# Altium PCB PCB1.PcbDoc (part 3 of 3)
Units mil, origin at the board's own origin, x right, y up, seen from the top; angles counter-clockwise.
Board outline 8430 x 1950 mil, 4 copper layers (Top Layer, VCC, GND, Bottom Layer); 357 components, 242 nets, 1572 pads, 599 vias.
Unrouted connection lines stored in the file: 1.
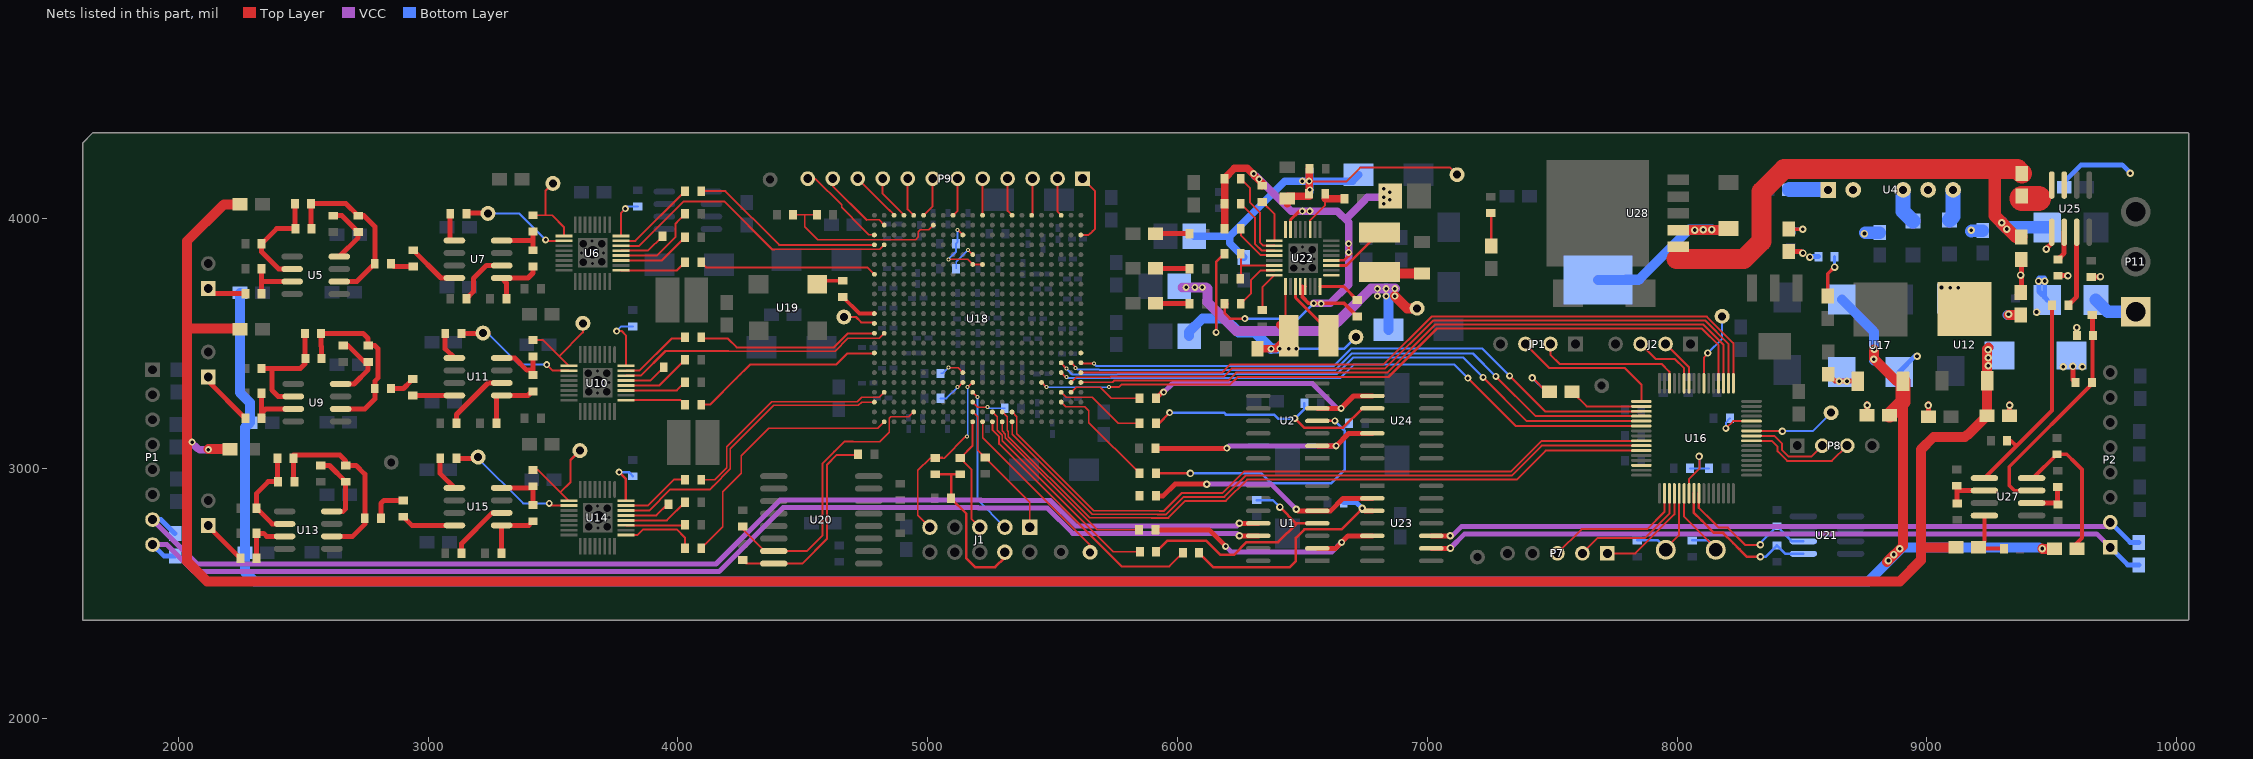
[diagram p5: the nets of this part, all layers, seen from the top]

## Via types
v1: diameter 16, hole 8, Top Layer to Bottom Layer, 223 vias
v2: diameter 30, hole 15, Top Layer to Bottom Layer, 157 vias
v3: diameter 28, hole 14, Top Layer to Bottom Layer, 154 vias
v4: diameter 24, hole 12, Top Layer to Bottom Layer, 60 vias
v5: diameter 196.85, hole 118.11, Top Layer to Bottom Layer, 4 vias
v6: diameter 50, hole 28, Top Layer to Bottom Layer, 1 vias

## Nets (pads, with @x,y where several pads share a name; then routed paths per layer and width w, separated by ;. In a path a pad name is that pad's centre, name@x,y a point inside that pad or via, vN(x,y) a via of type N, cw(c..) or ccw(c..) an arc to the next point about the centre after c; other vN are vias at no path point) (continued)
FPGA_LED8: U18.AB8 | length 3.1
  Top Layer w8: U18.AB8@5613.39,3462.2 U18.AB8@5615.59,3460
FPGA_NCE: R80.1 U18.L3 | length 140.2
  Top Layer w6: U18.L3@5180.31,3265.35 5200.67,3245 v1(5240,3245)
  Bottom Layer w6: v1(5240,3245) 5245,3240 R80.1@5310,3240
FPGA_NCONFIG: R83.1 U18.K5 | length 116
  Top Layer w8: v1(5120,3325) 5121.85,3325 U18.K5@5140.94,3344.09
  Bottom Layer w8: R83.1@5051.5,3280 5075,3280 v1(5120,3325)
FPGA_NCSO: C43.2 U18.E2 U20.7 | length 1185.2
  Top Layer w6: 4678,3107 4701,3107 4809,3107 4846,3144 4846,3200 4852,3206 4924.11,3206 U18.E2@4944.09,3225.98
  Top Layer w8: C43.2@4260,2767.54 4260,2757 4348,2669 U20.7@4384.04,2669 4516,2669 4578,2731 4578,3018.62 4625.38,3066 ; 4625.38,3068 4627.38,3068 4666.38,3107 4701,3107
FPGA_NSTATUS: R84.1 U18.K6 | length 107.7
  Top Layer w6: v1(5083,3403) 5121.41,3403 U18.K6@5140.94,3383.46
  Top Layer w8: U18.K6@5140.94,3383.46 U18.K6@5140.94,3384.06
  Bottom Layer w6: R84.1@5051.5,3380 5060,3380 v1(5083,3403)
FPGA_TCK: J1.1 R78.2 U18.L2 | length 555.7
  Top Layer w6: U18.L2@5180.31,3225.98 5200,3206.3 5200,3073.46 R78.2@5230,3043.46 5409,2864.46 J1.1@5409,2765
FPGA_TDI: J1.9 R77.1 U18.L5 | length 801.8
  Top Layer w6: 4975,2799 J1.9@5009,2765 4961,2813 4961,2992 5010.5,3041.5 R77.1@5030,3041.5 ; 5060,3045 5033.5,3045 R77.1@5030,3041.5 ; v1(5158,3128) 5153,3128 5066.5,3041.5 R77.1@5030,3041.5 ; v1@5161.22,3325 U18.L5@5180.31,3344.09
  Bottom Layer w6: v1@5160,3130 v1(5160,3325)
FPGA_TDO: J1.3 U18.L4 | length 593
  Top Layer w8: U18.L4@5180.31,3304.72 v1(5200,3285)
  Bottom Layer w8: v1(5200,3285) 5200,3003 5200,2874 J1.3@5309,2765
FPGA_TEST1: P9.1 U18.AB20 | length 302
  Top Layer w8: U18.AB20@5613.39,3934.65 5644.65,3934.65 5660,3950 ; P9.1@5620,4160 5670,4110 5670,3960 5660,3950 ; 5650,3940 5660,3950
FPGA_TEST2: P9.2 U18.Y22 | length 152.7
  Top Layer w8: P9.2@5520,4160 5520,4045 5520,4028.03 U18.Y22@5534.65,4013.39
FPGA_TEST3: P9.3 U18.U22 | length 193
  Top Layer w8: U18.U22@5416.54,4013.39 5420,4016.85 5420,4085 ; 5420,4040 5420,4085 ; P9.3@5420,4160 5420,4085
FPGA_TEST4: P9.4 U18.R22 | length 154
  Top Layer w8: P9.4@5320,4160 5320,4055 5320,4031.18 U18.R22@5337.8,4013.39
FPGA_TEST5: P9.5 U18.M22 | length 191.7
  Top Layer w8: U18.M22@5219.69,4013.39 5220,4013.7 5220,4085 ; 5220,4040 5220,4085 ; P9.5@5220,4160 5220,4085
FPGA_TEST6: P9.6 U18.J22 | length 154.2
  Top Layer w8: U18.J22@5101.57,4013.39 5120,4031.81 5120,4065 P9.6@5120,4160
FPGA_TEST7: P9.7 U18.F22 | length 161.7
  Top Layer w8: U18.F22@4983.46,4013.39 5020,4049.92 P9.7@5020,4160
FPGA_TEST8: P9.8 U18.E22 | length 156.6
  Top Layer w8: P9.8@4920,4160 4920,4060 4920,4037.48 U18.E22@4944.09,4013.39
FPGA_TEST9: P9.9 U18.D22 | length 234.7
  Top Layer w8: P9.9@4820,4160 4820,4100 4852.5,4067.5 ; 4890,4030 4852.5,4067.5 ; U18.D22@4904.72,4013.39 4904.72,4015.28 4852.5,4067.5
FPGA_TEST10: P9.10 U18.C22 | length 249.2
  Top Layer w8: P9.10@4720,4160 4820,4060 ; 4850,4030 4820,4060 ; U18.C22@4865.35,4013.39 4865.35,4014.65 4820,4060
FPGA_TEST11: P9.11 U18.B21 | length 300.6
  Top Layer w6: 4755,3995 4755.46,3994.54 4790,3994.54 4805.46,3994.54 U18.B21@4825.98,3974.02
  Top Layer w8: P9.11@4620,4160 4620,4130 4755,3995
FPGA_TEST12: P9.12 U18.A20 | length 368.6
  Top Layer w6: P9.12@4520,4160 4550,4160 4655,4055 4655,4045 4740,3960 4765,3935 ; 4767.77,3935 4765,3935 ; U18.A20@4786.61,3934.65 4765.35,3934.65 4765,3935
FPGA_TMS: J1.5 R76.1 U18.L1 | length 475.2
  Top Layer w8: U18.L1@5180.31,3186.61 5180.31,3091.81 R76.1@5130,3041.5 5175,2996.5 5175,2799 J1.5@5209,2765
GPS_TIMER: R103.2 U18.P1 | length 757.8
  Top Layer w6: U18.P1@5298.43,3186.61 5298.43,3149.93 5311,3137.36 5311,3122 5679,2754 R103.2@5846.54,2754
GPSX_N: P1.7 R1.2 U1.11 | length 4768.6
  Top Layer w20: v2@6246,2780 U1.11@6323.78,2780
  VCC w20: P1.7@1897,2795 2075,2617 4152.57,2617 4408.57,2873 5214.43,2873 5215.64,2871.79 5491.21,2871.79 5593,2770 6238,2770 v2(6248,2780)
  Bottom Layer w20: P1.7@1897,2795 1930.94,2795 R1.2@1987.02,2738.92
GPSX_P: P1.8 R1.1 U1.12 | length 4735.5
  Top Layer w20: v2@6246,2730 U1.12@6323.78,2730
  VCC w20: P1.8@1897,2695 1954.57,2695 2062.57,2587 4165,2587 4421,2843 5202,2843 5203.21,2841.79 5478.79,2841.79 5580.57,2740 6238,2740 v2(6248,2730)
  Bottom Layer w20: P1.8@1897,2695 1943.08,2648.92 R1.1@1987.02,2648.92
GPSY_N: P2.2 R3.2 U23.10 | length 2888.8
  Top Layer w20: U23.10@7016.22,2730 7091,2730 v2@7092,2729
  VCC w20: v2(7092,2730) 7099.57,2730 7137.57,2768 9718,2768 P2.2@9734,2784
  Bottom Layer w20: P2.2@9734,2784 9814.08,2703.92 R3.2@9849.02,2703.92
GPSY_P: P2.1 R3.1 U23.9 | length 2911.8
  Top Layer w20: U23.9@7016.22,2680 v2@7097,2680
  VCC w20: v2(7093,2681) 7150,2738 9680,2738 P2.1@9734,2684
  Bottom Layer w20: P2.1@9734,2684 9804.08,2613.92 R3.1@9849.02,2613.92
HMC5883_RDY: U16.62 | length 2.1
  Top Layer w8: U16.62@7855.69,3013.69 U16.62@7857.17,3012.21
HMC5883_SCL: P7.3 U16.2 | length 571
  Top Layer w8: P7.3@7521,2660 7618,2757 7880,2757 7949.69,2826.69 U16.2@7949.69,2900
HMC5883_SDA: P7.1 U16.4 | length 416.6
  Top Layer w8: P7.1@7721,2660 7833,2660 7989.06,2816.06 U16.4@7989.06,2900
HMC5883_WSDA: P7.2 U16.3 | length 495.2
  Top Layer w8: P7.2@7621,2660 7683,2722 7872.37,2722 7969.37,2819 U16.3@7969.37,2900
JTCK: JP1.3 U16.49 | length 599.1
  Top Layer w8: JP1.3@7393,3498 7489,3402 7791,3402 7857.17,3335.83 U16.49@7857.17,3268.11
JTMS: JP1.2 U16.46 | length 594
  Top Layer w8: JP1.2@7493,3498 7493,3455 7530,3418 7939,3418 7969.37,3387.63 U16.46@7969.37,3340.95
M+5V: C24.1 C25.1 R60.2 R62.2 R64.2 R117.1 U12.3 | length 10178.7
  Top Layer w40: v3@2120,3076.98 R64.2@2206.08,3076.98 ; R62.2@2246.08,3556.98 2243.06,3560 2035,3560 ; R60.2@2246.08,4056.98 2181.98,4056.98 2035,3910 2035,3560 ; 8976.02,2684.02 R117.1@9116.92,2684.02 ; 8976,2874 8976,3075 9027,3126 9153,3126 9160,3133 9162.98,3133 9181.49,3151.51 C25.1@9239.92,3209.94 U12.3@9239.92,3349.55 ; 8976,2946.02 8976,2632 8892,2548 2115,2548 2035,2628 2035,3560 ; U12.3@9241.43,3351.05 9241.43,3478.43 v2@9247,3484
  VCC w30: v3@2052.5,3102.5 2075,3080 ; 2085,3075 v3(2120,3075)
  other v2: 9246,3411 9246,3443 9245,3475
  other v3: 2055,3105
M-5V: C34.2 C37.2 R69.2 R71.2 R72.2 R118.2 U17.3 | length 9907.9
  Top Layer w40: v2(8789,3477) 8789,3439 8878.95,3349.05 U17.3@8904.43,3349.05 ; v2@8841,2626 8904.43,2689.43 8904.43,3300 ; v2(9462,2679) 9463.02,2677.98 R118.2@9511.08,2677.98
  Top Layer w60: C37.2@8850.92,3212.94 8904.43,3266.45 8904.43,3300 U17.3@8904.43,3349.05
  Bottom Layer w40: R69.2@2246.08,3703.02 2246.08,3303.92 2286.08,3263.92 R71.2@2286.08,3183.02 2266.08,3163.02 R72.2@2266.08,2663.02 2266.08,2585.92 2304,2548 8742,2548 8766,2548 8818.5,2600.5 ; C34.2@8660,3676 8789,3547 v2@8789,3432 ; v2@8900,2682 8818.5,2600.5 ; v2@9449,2683 8901,2683 8818.5,2600.5
  other v2: 8846,2631 8868,2655 8892,2678 8787,3437
MAIN_DATA: R105.1 U18.AA4 | length 301.5
  Top Layer w6: U18.AA4@5574.02,3304.72 5594.29,3325 5690,3325 5735,3280 R105.1@5848.5,3280
MAIN_DATA_1: R88.1
MAIN_DATA_RXEN: R106.1 U18.Y4 | length 365.5
  Top Layer w6: U18.Y4@5534.65,3304.72 5555.17,3284.2 5659.31,3284.2 5763.51,3180 R106.1@5848.5,3180
MAIN_DATA_RXEN_1: R109.2 U18.N1 | length 1105.6
  Top Layer w8: U18.N1@5259.06,3186.61 5259.06,3153.94 5286,3127 5286,3098 5776,2608 5837,2608 ; 5792,2608 5837,2608 ; R109.2@6021.54,2662 5967.54,2608 5837,2608
MAIN_DATA_TXEN: R102.1 U18.Y3 | length 459.3
  Top Layer w6: U18.Y3@5534.65,3265.35 5553.49,3246.51 5628.49,3246.51 5645,3230 5645,3183.5 R102.1@5848.5,2980
MAIN_DATA_TXEN_1: R87.1 U18.N2 | length 866.9
  Top Layer w6: U18.N2@5259.06,3225.98 5279,3206.04 5279,3170 5279,3152.38 5299,3132.38 5299,3110 5743,2666 R87.1@5849.5,2666
MCLK_A: U6.30 U18.B19 | length 1215.2
  Top Layer w6: 4387,3876.43 4807.14,3876.43 U18.B19@4825.98,3895.28
  Top Layer w8: U6.30@3771.99,3891.31 3845,3891.31 4022.69,4069 4185.43,4069 4378,3876.43 4387,3876.43
MCLK_B: U10.30 U18.B10 | length 1114.5
  Top Layer w6: 4203,3470 4630,3470 4680.42,3520.42 4805.42,3520.42 ; 4812.64,3527.64 4805.42,3520.42 ; U18.B10@4825.94,3540.94 4805.42,3520.42
  Top Layer w8: U10.30@3791.99,3371.31 3851.77,3371.31 3950.46,3470 4203,3470
MCLK_C: U14.30 U18.A3 | length 1223.2
  Top Layer w6: 4139.24,2927.12 4209.91,2997.8 4209.91,3078.91 4384,3253 4723,3253 4735.35,3265.35 U18.A3@4786.61,3265.35
  Top Layer w8: U14.30@3791.99,2831.31 3885.27,2831.31 3969.96,2916 3986.63,2916 3987.61,2915.02 4127.14,2915.02 4139.24,2927.12 ; U18.A3@4786.26,3265 U18.A3@4786.61,3265.35
MCU_FPGA_BAK1: U16.54 U18.Y6 | length 2448.8
  Top Layer w8: U18.Y6@5534.65,3383.46 v1@5553.11,3365 ; v3(7163,3361) 7354.31,3169.69 7401,3169.69 U16.54@7857.17,3169.69
  Bottom Layer w8: v1@5558,3362 6652,3362 6705,3415 7109,3415 v3(7163,3361)
  other v1: 5555,3365
MCU_FPGA_BAK2: U16.51 U18.AB7 | length 2457.2
  Top Layer w8: U18.AB7@5613.39,3422.83 5616.22,3420 v1(5665,3420) ; v3(7330,3370) 7471.26,3228.74 U16.51@7857.17,3228.74
  Bottom Layer w8: v1(5665,3420) 5675,3410 5805,3410 ; 5730,3410 5805,3410 ; v3(7330,3370) 7220,3480 6695,3480 6625,3410 5805,3410
MCU_FPGA_BAK3: U16.52 U18.AA7 | length 2419.2
  Top Layer w8: U18.AA7@5574.02,3422.83 v1@5592.5,3404.35 ; v3@7270,3371 v3@7274,3367 ; v3(7275,3368) 7433.94,3209.06 U16.52@7857.17,3209.06
  Bottom Layer w8: 5599,3396 5685,3396 ; 5687,3394 6631.63,3394 6697.63,3460 7183,3460 v3(7275,3368)
  other v1: 5592.5,3402.5
MCU_FPGA_BAK4: U16.53 U18.Y7 | length 2474.2
  Top Layer w8: U18.Y7@5534.65,3422.83 5534.65,3420.35 v1(5555,3400) ; v3(7224,3364) 7398.63,3189.37 U16.53@7857.17,3189.37
  Bottom Layer w8: v1(5555,3400) 5579,3376 5758,3376 ; 5760,3378 6638.25,3378 6704.25,3444 7144,3444 v3(7224,3364)
MCU_FPGA_BAK5: U16.57 U18.R2 | length 2839.9
  Top Layer w6: U18.R2@5337.8,3225.98 5356,3207.78 5356,3195.7 5356.64,3195.06 5356.64,3138.36 5665,2830 5929,2830
  Top Layer w8: 5929,2830 5946.02,2830 6018.02,2902 6180.67,2902 6265.67,2987 7334,2987 7457.63,3110.63 U16.57@7857.17,3110.63
MCU_FPGA_BAK6: U16.58 U18.R1 | length 2818.8
  Top Layer w6: U18.R1@5337.8,3186.61 5337.8,3136.2 5658,2816 5920,2816
  Top Layer w8: 5920,2816 5954.64,2816 6024.64,2886 6187.3,2886 6272.3,2971 7011,2971 7337.8,2971 7457.74,3090.95 U16.58@7857.17,3090.95 U16.58@7855.39,3092.72
MCU_FPGA_BAK7: U16.59 U18.P2 | length 2889.5
  Top Layer w6: U18.P2@5298.43,3225.98 5318,3206.41 5318,3152.33 5323,3147.33 5323,3126.97 5647.97,2802 5896,2802
  Top Layer w8: 5896,2802 5963.27,2802 6031.27,2870 6193.93,2870 6278.93,2955 7061.07,2955 7358,2955 7474.26,3071.26 U16.59@7857.17,3071.26
MSEL0: R79.2 U18.K20 U18.L17 U18.M17 | length 307.9
  Top Layer w6: v1(5083,3837) 5159.85,3837 U18.L17@5180.31,3816.54
  Top Layer w8: v1(5120,3955) 5140.35,3934.65 U18.K20@5140.94,3934.65 ; U18.L17@5180.31,3816.54 U18.M17@5219.69,3816.54
  Bottom Layer w8: v1(5083,3837) 5113.46,3867.46 R79.2@5113.46,3900 5120,3906.54 v1(5120,3955)
MSEL1: R81.2 U18.L18 | length 122.4
  Top Layer w6: v1(5162,3875) 5162,3874.22 U18.L18@5180.31,3855.91 U18.L18@5180.31,3855.31
  Bottom Layer w6: R81.2@5113.46,3800 5113.46,3826.46 v1(5162,3875)
NetC10_1: C10.1 C12.1 R9.2 R21.2 U5.6 | length 714.1
  Top Layer w20: R9.2@2533.46,3960 2531.5,3961.97 C10.1@2531.5,4060 2671.5,4060 C12.1@2720,4011.5 2743.5,4011.5 2786.54,3968.46 R21.2@2786.54,3820 2714.54,3748 U5.6@2644.49,3748
NetC10_2: C10.2 R9.1 R13.2 U5.2 | length 444.6
  Top Layer w20: U5.2@2455.51,3798 2402,3798 2333.46,3866.54 R13.2@2333.46,3900 2393.46,3960 R9.1@2468.5,3960 2466.54,3961.97 C10.2@2466.54,4060
NetC11_1: C11.1 C12.2 U5.8 | length 256.7
  Top Layer w20: C11.1@2620,4011.5 2655.04,4011.5 C12.2@2720,3946.54 2720,3923.51 U5.8@2644.49,3848
NetC16_1: C16.1 C83.1 R128.2 U28.1 | length 2172.9
  Top Layer w50: 9271,4198 9271,4012 9355.92,3927.08 C83.1@9377.94,3927.08
  Top Layer w80: 7998,3838 8267,3838 8338,3909 8338,4108 8428,4198 9362.9,4198 R128.2@9379.98,4180.92
  Bottom Layer w50: v2(9299.57,3983.43) 9318,3965 C16.1@9482,3965
  other v2: 9320,3958
NetC19_1: C19.1 C21.1 R26.2 R38.2 U9.6 | length 730.6
  Top Layer w20: R26.2@2573.46,3440 2573.46,3488.54 2571.5,3490.5 C19.1@2571.5,3540 2740,3540 2760,3520 C21.1@2760,3491.5 2787.5,3491.5 2799,3480 2799,3361.46 2786.54,3349 R38.2@2786.54,3320 2786.54,3278 2746.54,3238 U9.6@2649.49,3238
NetC19_2: C19.2 R26.1 R30.2 U9.2 | length 485.4
  Top Layer w20: R30.2@2333.46,3400 2375,3400 ; U9.2@2460.51,3288 2400,3288 2375,3313 2375,3400 ; C19.2@2506.54,3540 2506.54,3440 2506.54,3418.03 2488.5,3400 2375,3400
NetC20_1: C20.1 C21.2 U9.8 | length 292.6
  Top Layer w20: U9.8@2649.49,3338 2703,3338 2760,3395 C21.2@2760,3426.54 2744.96,3426.54 2680,3491.5 C20.1@2660,3491.5
NetC28_1: C28.1 C30.1 R43.2 R55.2 U13.6 | length 787.2
  Top Layer w20: R43.2@2464.54,2946.98 2461.5,2950.03 C28.1@2461.5,3040 2461.5,3053 2647,3053 2670,3030 C30.1@2670,3011.5 2712,3011.5 2746.54,2976.96 R55.2@2746.54,2800 2746.54,2776.54 2698,2728 U13.6@2614.49,2728
NetC28_2: C28.2 R43.1 R47.2 U13.2 | length 397.8
  Top Layer w20: C28.2@2396.54,3040 2396.54,2950.02 R43.1@2399.58,2946.98 2360,2946.98 2313.46,2900.44 R47.2@2313.46,2840 2375.46,2778 U13.2@2425.51,2778
NetC29_1: C29.1 C30.2 U13.8 | length 295.1
  Top Layer w20: C29.1@2570,3011.5 2605.04,3011.5 C30.2@2670,2946.54 2670,2838 2660,2828 U13.8@2614.49,2828
NetC41_2: C41.2 R85.2 U20.8 | length 822.5
  Top Layer w8: C41.2@4260,2633.54 4274.54,2619 U20.8@4384.04,2619 4498,2619 4597,2718 4597,3014.99 4636.01,3054 4719.54,3054 R85.2@4721.54,3056
NetC112_1: C112.1 J5.1 L1.2 R90.1 T19.1 U22.25 | length 1579.9
  Top Layer w8: U22.25@6432.89,3728.01 6432.89,3584.39 L1.2@6466.07,3551.21
  Top Layer w10: v3(6155,3545) 6155,3826.5 R90.1@6188.5,3860
  Top Layer w30: C112.1@6319.99,3479 v3(6375,3479) 6393.86,3479 L1.2@6446.07,3531.21 6446.07,3538.93 L1.2@6410,3575
  Bottom Layer w10: v3(6155,3545) 6155,3595 6160,3600 ; v3(6445,3480) 6668.45,3480 T19.1@6714.48,3526.03
  Bottom Layer w40: J5.1@6046.67,3529.23 6046.67,3546.67 6100,3600 6190,3600 6245,3545 6309,3545 v3(6375,3479) 6376,3480 v3@6465,3480
  other v3: 6410,3480 6475,3480
NetC113_1: C113.1 C116.1 J6.1 L2.2 T17.1 U22.1 | length 1477.3
  Top Layer w40: L2.2@6808.79,3786.07 6814.85,3780.01 C116.1@6979,3780.01 ; v3(6870,3690) 6918.97,3641.03 T17.1@6959.48,3641.03
  VCC w40: 6020,3725 6115,3725 6120,3720 6120,3665 6235,3550 6605,3550 6670,3615 6775,3720 v3(6870,3720)
  Bottom Layer w40: v3(6835,3720) 6845.43,3709.57 C113.1@6845.43,3554.64
  other v3: 6800,3690 6835,3690 6800,3720 6035,3725 6070,3725 6100,3725
NetC137_2: C137.2 C138.1 C139.1 J7.1 R96.2 R97.1 T20.1 U22.16 | length 1834.8
  Top Layer w8: v3(6527.01,4150) 6529.01,4148 6675,4148 6731,4204 7091.5,4204 T20.1@7119.48,4176.03
  Top Layer w30: C139.1@6440.98,4090 R96.2@6528.5,4090 ; R96.2@6527.01,4101.97 v3(6527.01,4150) R97.1@6527.01,4200
  Bottom Layer w30: J7.1@6066.67,3929.23 6209.23,3929.23 ; C137.2@6264.94,3844.92 6209.23,3900.64 6209.23,3929.23 ; 6525,4100 6530,4105 6530,4200 6527.01,4197.01 v3(6527.01,4150) ; C138.1@6725.43,4174.64 6700.79,4150 v3(6527.01,4150) ; 6209.23,3929.23 6430,4150 v3(6527.01,4150)
  other v3: 6530,4115 6500,4150
NetC147_2: C147.2 U25.6 | length 119.4
  Top Layer w20: C147.2@9525,3836.46 9550,3861.46 U25.6@9550,3945.51
NetC153_2: C153.2 R118.1 U27.4 | length 622.1
  Top Layer w15: U27.4@9419.49,2961 9425.46,2961 C153.2@9521,3056.54 9560.46,3056.54 9597,3020 9621,2996 9621,2721.9 9580.08,2680.98 R118.1@9597,2697.9
NetC154_1: C154.1 R117.2 U27.8 | length 240.4
  Top Layer w15: U27.8@9230.51,2811 9230.51,2707.61 R117.2@9206.92,2684.02 9211.94,2679 C154.1@9308.5,2679
NetD2_1: D2.1 R112.1 | length 197.1
  Top Layer w8: v2@7422,3362 7476.36,3307.64 D2.1@7489.07,3307.64
  Bottom Layer w8: v2(7420,3362) 7478,3304 R112.1@7503.5,3304
NetD4_1: D4.1 R8.1 | length 79.8
  Top Layer w40: v2@9327.08,3615.08 D4.1@9375.36,3615.08
  Bottom Layer w40: v2@9323.5,3614.5 R8.1@9355,3614.5
  other v2: 9327,3617
NetD5_1: D5.1 R73.1 | length 170.7
  Top Layer w15: D5.1@8603.64,3689.92 8603.64,3779.14 v2(8630.5,3806)
  Bottom Layer w12: v2@8630.5,3804.5 R73.1@8630.5,3848
NetD6_1: D6.1 R126.1 | length 115.7
  Top Layer w15: D6.1@8446.64,3957.92 v2@8508.08,3957.92
  Bottom Layer w15: R126.1@8456,3951.5 8461.5,3957 v2@8508,3957
  other v2: 8503,3957
NetD7_1: D7.1 R127.1 | length 133.3
  Top Layer w10: R127.1@7255,4022.5 7256.64,4020.86 D7.1@7256.64,3889.93
NetD8_2: D8.2 L3.1 U28.2 | length 957.1
  Top Layer w40: U28.2@8007,3955 D8.2@8201.21,3955 ; D8.2@8199.21,3954.21 D8.2@8205,3960
  Bottom Layer w40: L3.1@7795,3757 7849,3757 ; v2(8139,3956) 8048,3956 7846,3754 ; 7846,3754 L3.1@7684,3754 7846,3754
  other v2: 8071,3954 8105,3955
NetD13_1: D13.1 R133.1 | length 136.7
  Top Layer w20: D13.1@5911.93,3660.36 6048.14,3660.36 R133.1@6048.5,3660
NetD14_1: D14.1 R134.1 | length 136.7
  Top Layer w20: D14.1@5911.93,3800.36 5912.29,3800 R134.1@6048.5,3800
NetD15_1: D15.1 R135.1 | length 136.7
  Top Layer w20: D15.1@5911.93,3940.36 6048.14,3940.36 R135.1@6048.5,3940
NetJ1_4: J1.4 R75.2 R76.2 R77.2 | length 668.3
  Top Layer w10: R77.2@5030,2976.54 5095,2976.54 ; R76.2@5130,2976.54 5095,2976.54 ; J1.4@5309,2665 5309,2644 5270,2605 5190,2605 5155,2640 5155,2818.46 R75.2@5093.46,2880 5093.46,2975 5095,2976.54
NetJ4_2: J4.2 R89.1 R92.1 R93.1 R94.1 R95.1 R98.1 U22.4 U22.15 U22.28 U22.29 | length 3380.7
  Top Layer w10: R89.1@6188.5,3657.79 6188.5,3621.5 6210,3600 v3(6270,3600) ; U22.4@6615.76,3832.34 6667.34,3832.34 6685,3850 ; v3@6685,3910 v3(6685,3900) v3(6685,3865) 6685,3850 ; v3@6695,3860 6685,3850
  Top Layer w12: U22.15@6452.57,3956.35 6452.57,3995.44 6487.13,4030 v3(6500,4030) v3(6530,4030) ; 6500,3728.01 U22.29@6511.63,3728.01
  Top Layer w15: 6500,3728.01 6500,3686.35 6525.67,3660.67 v3(6545,3660.67) v3@6564.33,3660.67 ; v3@6565,3660 v3@6564.33,3660.67 ; R92.1@6720,3608.5 6667.83,3660.67 v3@6564.33,3660.67
  Top Layer w30: R89.1@6188.5,3657.79 R89.1@6188.5,3660 ; R93.1@6188.5,3960 R94.1@6188.5,4060 R95.1@6188.5,4160 R95.1@6188.5,4162.21 ; R95.1@6188.5,4163.5 R95.1@6188.5,4162.21 ; R98.1@6340,4131.5 6340,4140.64 6278.74,4201.9 6228.19,4201.9 R95.1@6188.5,4162.21
  VCC w20: v3(6500,4030) 6515,4030 v3(6530,4030) 6645,4030 6675,4000 ; v3(6545,3660.67) 6610.67,3660.67 6685,3735 v3(6685,3865) v3(6685,3900) 6685,3990 6675,4000 ; v3(6825,4085) 6760,4085 6675,4000
  VCC w30: v3@6310,4170 6315,4170 6455,4030 6515,4030 ; v3(6500,4030) 6640,4030 6685,3985 6685,3735 6610.67,3660.67 v3(6545,3660.67) ; 6675,4000 6745,4070 6760,4085 6840,4085
  Bottom Layer w10: v3(6270,3600) 6484.33,3600 v3(6545,3660.67) 6504.33,3620
  other v3: 6575,3660 6825,4060 6850,4075 6850,4105 6825,4120 6327.14,4157.86 6305,4180
NetL1_1: L1.1 U22.27 | length 232.8
  Top Layer w10: U22.27@6472.26,3728.01 U22.27@6473.43,3726.84
  Top Layer w12: U22.27@6472.26,3728.01 6472.26,3683.68 L1.1@6604.34,3551.61
NetL2_1: L2.1 U22.3 | length 247.2
  Top Layer w12: U22.3@6615.76,3812.65 6675,3812.65 6676.71,3812.65 L2.1@6808.39,3944.34
NetL4_1: L4.1 U4.6 | length 126.8
  Bottom Layer w60: L4.1@9091,3994 9105,4008 U4.6@9105,4115
NetL5_1: L5.1 U4.4 | length 141.2
  Bottom Layer w60: U4.4@8905,4115 8905,4029 L5.1@8944,3990
NetR10_1: R10.1 R15.2 U7.1 | length 235.9
  Top Layer w20: U7.1@3294.49,3762 3314,3742.49 3314,3680 R15.2@3314,3675 ; U7.1@3314,3762 3400,3762 3420,3782 R10.1@3420,3808.5
NetR11_2: R11.2 T1.1 U6.9 | length 318.6
  Top Layer w8: R11.2@3420,4013.46 3470,4013.46 ; T1.1@3499.48,4141.03 3470,4111.55 3470,4013.46 ; U6.9@3543.65,3930.68 3543.65,3966.35 3496.54,4013.46 3470,4013.46
NetR12_2: R12.2 U7.2 | length 226.4
  Top Layer w20: R12.2@3153.46,3680 3181,3707.54 3181,3760 3233,3812 U7.2@3294.49,3812
NetR14_1: R14.1 U6.27 | length 294.9
  Top Layer w8: U6.27@3771.99,3832.26 3935.76,3832.26 R14.1@4028.5,3925
NetR16_1: R16.1 S1.1 | length 156.8
  Top Layer w20: S1.1@2120,3720 2140,3700 R16.1@2268.5,3700
NetR16_2: R16.2 R20.2 U5.3 | length 224.9
  Top Layer w20: R16.2@2333.46,3700 2333.46,3755 ; R20.2@2333.46,3800 2333.46,3755 ; U5.3@2455.51,3748 2340.46,3748 2333.46,3755
NetR17_1: R17.1 U6.28 | length 358
  Top Layer w8: U6.28@3771.99,3851.94 3914.94,3851.94 3991,3928 3991,3979.94 3995.69,3984.63 4028.5,4017.45 R17.1@4028.5,4020
NetR18_1: R18.1 U6.31 | length 339.2
  Top Layer w8: U6.31@3771.99,3911 3830,3911 4028.5,4109.5 R18.1@4028.5,4110
NetR19_1: R19.1 U6.32 | length 170.3
  Top Layer w8: U6.32@3771.99,3930.68 3771.99,4021.99 v3(3790,4040)
  Bottom Layer w8: v3(3790,4040) 3798.5,4048.5 R19.1@3840,4048.5
NetR21_1: R21.1 R23.1 | length 99
  Top Layer w20: R21.1@2851.5,3820 2863.5,3808 R23.1@2940,3808 ; R23.1@2940,3808.5 R23.1@2940,3808 ; R23.1@2945,3808 R23.1@2940,3808
NetR22_1: R22.1 U6.25 | length 269.8
  Top Layer w8: U6.25@3771.99,3792.89 3996.39,3792.89 R22.1@4028.5,3825
NetR23_2: R23.2 U7.8 | length 211.7
  Top Layer w20: R23.2@2940,3873.46 3051.46,3762 U7.8@3105.51,3762
NetR24_2: R24.2 T2.1 U6.10 | length 438.2
  Top Layer w8: v3(3470,3915) 3474,3911 U6.10@3543.65,3911
  Top Layer w10: R24.2@3153.46,4020 R24.2@3153.46,4022
  Top Layer w20: R24.2@3153.46,4022 3238.5,4022 T2.1@3239.48,4021.03
  Bottom Layer w8: T2.1@3239.48,4021.03 3363.97,4021.03 v3(3470,3915)
NetR25_1: R25.1 U4.1 | length 155.3
  Bottom Layer w60: R25.1@8450.08,4116.02 8603.98,4116.02 U4.1@8605,4115
NetR27_1: R27.1 R32.2 U11.1 | length 267.7
  Top Layer w20: R32.2@3273.46,3180 3273,3180 3273,3292 U11.1@3294.49,3292 3400,3292 3418.25,3310.25 R27.1@3420,3312
NetR28_2: R28.2 T3.1 U10.9 | length 356.9
  Top Layer w8: R28.2@3420,3513.46 3460.87,3513.46 3524.66,3449.66 ; U10.9@3563.65,3410.68 3524.66,3449.66 ; T3.1@3619.48,3581.03 3619.48,3544.48 3524.66,3449.66
NetR29_2: R29.2 U11.2 | length 268.9
  Top Layer w20: R29.2@3113.46,3180 3113.46,3215.46 3240,3342 U11.2@3294.49,3342
NetR31_1: R31.1 U10.27 | length 250.1
  Top Layer w8: U10.27@3791.99,3312.26 3995.76,3312.26 R31.1@4028.5,3345
NetR33_1: R33.1 S2.1 | length 227.5
  Top Layer w20: S2.1@2120,3366 2120,3348.5 R33.1@2268.5,3200
NetR33_2: R33.2 R37.2 U9.3 | length 279.1
  Top Layer w20: R37.2@2333.46,3300 2334,3300 2334,3222 ; U9.3@2460.51,3238 2350,3238 ; 2334,3222 2334,3200 R33.2@2333.46,3200 2333.46,3221.46 2334,3222 ; 2334,3222 2350,3238 ; 2334,3222 2350,3238
NetR34_1: R34.1 U10.28 | length 279.2
  Top Layer w8: U10.28@3791.99,3331.94 3925.45,3331.94 R34.1@4028.5,3435
NetR35_1: R35.1 U10.31 | length 289.9
  Top Layer w8: U10.31@3791.99,3391 3846,3391 3975,3520 R35.1@4028.5,3520
NetR36_1: R36.1 U10.32 | length 239
  Top Layer w8: v3(3755,3550) 3775,3550 3791.99,3533.01 U10.32@3791.99,3410.68
  Bottom Layer w8: v3(3755,3550) 3773.5,3568.5 R36.1@3820,3568.5
NetR38_1: R38.1 R40.1 | length 103
  Top Layer w20: R38.1@2851.5,3320 2901.5,3320 2930.25,3348.75 R40.1@2939,3357.5
NetR39_1: R39.1 U10.25 | length 243.9
  Top Layer w8: U10.25@3791.99,3272.89 4010.61,3272.89 R39.1@4028.5,3255
NetR40_2: R40.2 U11.8 | length 213.8
  Top Layer w20: R40.2@2939,3292.54 2939.54,3292 U11.8@3105.51,3292 3058.46,3292
NetR41_2: R41.2 T4.1 U10.10 | length 472.3
  Top Layer w8: v3(3475,3415) 3499,3391 U10.10@3563.65,3391
  Top Layer w20: 3153.46,3540 T4.1@3239.48,3541.03
  Bottom Layer w8: T4.1@3239.48,3541.03 3365.5,3415 v3(3475,3415)
NetR44_1: R44.1 R49.2 U15.1 | length 245.8
  Top Layer w20: R49.2@3293.46,2660 U15.1@3293.46,2770.98 ; U15.1@3294.49,2770.98 U15.1@3293.46,2770.98 ; R44.1@3420,2788.5 3403.5,2772 U15.1@3294.49,2772 U15.1@3293.46,2770.98
NetR45_2: R45.2 T5.1 U14.9 | length 393.1
  Top Layer w8: R45.2@3420,2993.46 3440.87,2993.46 3529.66,2904.66 ; U14.9@3563.65,2870.68 3529.66,2904.66 ; T5.1@3607.48,3071.03 3570,3033.55 3570,2945 3529.66,2904.66
NetR46_2: R46.2 U15.2 | length 250.7
  Top Layer w20: R46.2@3133.46,2660 3133.46,2698.46 3257,2822 U15.2@3294.49,2822
NetR48_1: R48.1 U14.27 | length 237.6
  Top Layer w8: U14.27@3791.99,2772.26 4025.76,2772.26 R48.1@4028.5,2775
NetR50_1: R50.1 S3.1 | length 184.2
  Top Layer w20: S3.1@2120,2771 2120,2768.5 R50.1@2248.5,2640
NetR50_2: R50.2 R54.2 U13.3 | length 217
  Top Layer w20: R50.2@2313.46,2640 R54.2@2313.46,2740 2342,2740 2354,2728 U13.3@2425.51,2728
NetR51_1: R51.1 U14.28 | length 266.8
  Top Layer w8: U14.28@3791.99,2791.94 3955.45,2791.94 R51.1@4028.5,2865
NetR52_1: R52.1 U14.31 | length 279.6
  Top Layer w8: U14.31@3791.99,2851 3879.5,2851 3983.5,2955 R52.1@4028.5,2955
NetR53_1: R53.1 U14.32 | length 187.3
  Top Layer w10: v3(3765,2985) 3791.99,2958.01 U14.32@3791.99,2870.68
  Bottom Layer w10: v3(3765,2985) 3803.5,2985 R53.1@3820,2968.5
NetR55_1: R55.1 R57.1 | length 153.3
  Top Layer w20: R55.1@2811.5,2800 2811.5,2860 2822.99,2871.5 R57.1@2900,2871.5
NetR56_1: R56.1 U14.25 | length 302.5
  Top Layer w8: U14.25@3791.99,2732.89 3837.63,2732.89 3860.74,2756 3995,2756 4028.5,2722.5 R56.1@4028.5,2680
NetR57_2: R57.2 U15.8 | length 219.8
  Top Layer w20: R57.2@2900,2806.54 2934.54,2772 U15.8@3105.51,2772
NetR58_2: R58.2 T6.1 U14.10 | length 536
  Top Layer w8: v3(3485,2860) 3494,2851 U14.10@3563.65,2851
  Top Layer w20: R58.2@3113.46,3040 T6.1@3195.45,3040 ; T6.1@3199.48,3040 T6.1@3195.45,3040 ; T6.1@3200.48,3045.03 T6.1@3195.45,3040
  Bottom Layer w8: T6.1@3199.48,3041.03 3380.5,2860 v3(3485,2860)
NetR59_2: R59.2 R87.2 U1.4 | length 938.9
  Top Layer w10: R87.2@5914.46,2666 5958.46,2710 6116,2710 6172,2654 6226,2654 6277,2705 6403,2705 6478,2780 ; v2(6410,2845) 6475,2780 6478,2780 ; U1.4@6560,2780 6478,2780
  Bottom Layer w10: R59.2@6317,2873.46 6381.54,2873.46 v2(6410,2845)
NetR66_1: R66.1 U16.28 | length 162.1
  Top Layer w8: v3(8195,3160) 8224.37,3189.37 U16.28@8298.11,3189.37
  Bottom Layer w8: v3(8195,3160) 8195,3183.5 R66.1@8211.5,3200
NetR74_1: R74.1 U19.3 | length 108.7
  Top Layer w15: U19.3@4557.37,3736.9 4571.97,3751.5 R74.1@4660,3751.5
NetR74_2: R74.2 U18.A12 | length 154.3
  Top Layer w15: R74.2@4660,3686.54 4726.85,3619.69 U18.A12@4786.61,3619.69
NetR88_2: R88.2 U1.5 U23.2 | length 951
  Top Layer w20: R88.2@5913.46,2890 5943,2890 5990,2937 v2(6117,2937) ; v2(6476,2836) 6482,2830 U1.5@6560,2830 6613,2830 6663,2880 U23.2@6780,2880
  VCC w20: v2(6117,2937) 6375,2937 v2(6476,2836)
NetR89_2: R89.2 U22.23 | length 220.7
  Top Layer w8: R89.2@6253.46,3660 6295,3701.54 6295,3755 6332.97,3792.97 U22.23@6387.81,3792.97
NetR92_2: R92.2 U22.32 | length 171.9
  Top Layer w12: U22.32@6570.68,3728.01 6665.46,3728.01 R92.2@6720,3673.46
NetR93_2: R93.2 U22.20 | length 194.4
  Top Layer w8: R93.2@6253.46,3960 6253.46,3933.91 6333.18,3854.2 6385.64,3854.2 U22.20@6387.81,3852.02
NetR94_2: R94.2 U22.19 | length 272.9
  Top Layer w8: R94.2@6253.46,4060 6310,4003.46 6310,3900 6338.29,3871.71 U22.19@6387.81,3871.71
NetR95_2: R95.2 U22.18 | length 373.2
  Top Layer w8: R95.2@6253.46,4160 6290,4123.46 6290,4064.92 6330,4024.92 6330,3905 ; 6330,3925 6330,3905 ; U22.18@6385.64,3893.57 U22.18@6387.81,3891.39 6343.61,3891.39 6330,3905
NetR96_1: R96.1 R99.1 U22.11 | length 225.6
  Top Layer w8: U22.11@6531.31,3956.35 6531.31,3992.61 6591.5,4052.8 6591.5,4080
  Top Layer w30: 6591.5,4080 R99.1@6668.5,4080
NetR98_2: R98.2 U22.17 | length 175.3
  Top Layer w8: R98.2@6340,4066.54 6387.81,4018.73 U22.17@6387.81,3911.08
NetR100_2: R100.2 U22.24 | length 159.6
  Top Layer w8: R100.2@6340,3633.46 6340,3725.47 U22.24@6387.81,3773.28
NetR102_2: R102.2 R124.2 U2.4 | length 1110.8
  Top Layer w10: R102.2@5913.46,2980 v2(6052,2980) ; U2.4@6560,3190 v3(6630,3190)
  Bottom Layer w10: v2(6052,2980) 6336,2980 6376,2940 6615,2940 6670,2995 6670,3150 6662.5,3157.5 ; v3(6630,3190) 6662.5,3157.5 ; R124.2@6686.54,3180 6685,3180 6662.5,3157.5
NetR103_1: R103.1 U1.2 U23.5 | length 1038.4
  Top Layer w20: R103.1@5911.5,2754 6127,2754 v3(6193,2688) ; U1.2@6560,2680 6633,2680 6683,2730 U23.5@6780,2730
  VCC w20: v3(6193,2688) 6215,2666 6619,2666 v3(6657,2704)
NetR104_1: R104.1 U2.2 U24.5 | length 973.4
  Top Layer w20: R104.1@5911.5,3086.5 R104.1@5911.5,3080 v3@6197,3080 ; U2.2@6560,3090 v3(6635,3090) 6685,3140 U24.5@6780,3140
  VCC w20: v3(6198,3081) 6207,3090 v3(6635,3090)
NetR105_2: R105.2 U2.5 U24.2 | length 1048.5
  Top Layer w20: R105.2@5913.46,3280 5938.46,3305 v3(5945,3305) ; U2.5@6560,3240 v3(6655,3240) 6705,3290 U24.2@6780,3290
  VCC w20: v3(5945,3305) 5980,3340 6539.94,3340 6639.94,3240 v3(6655,3240)
NetR106_2: R106.2 R125.1 U24.3 | length 1015.9
  Top Layer w10: R106.2@5913.46,3180 5926,3180 v3(5969,3223) ; v3(6470,3200) 6507,3163 6663,3163 6740,3240 U24.3@6780,3240
  Bottom Layer w10: v3(5969,3223) 6186,3223 6194,3215 6387,3215 6404,3198 v3@6468,3198 ; v3(6470,3200) 6508.5,3238.5 R125.1@6508.5,3260
NetR108_2: R108.2 U25.7 | length 305.4
  Top Layer w20: R108.2@9566.46,3654 9600,3687.54 U25.7@9600,3945.51
NetR109_1: R109.1 R113.1 U23.3 | length 943.8
  Top Layer w10: R109.1@6086.5,2662 6144.5,2604 6449,2604 6474,2629 6474,2722 6508,2756 6656,2756 v2@6730,2830
  Top Layer w20: v2(6740,2840) 6750,2830 U23.3@6780,2830
  Bottom Layer w20: R113.1@6665.5,2863 6717,2863 v2(6740,2840)
NetR115_2: R115.2 R116.1 U27.2 | length 178.2
  Top Layer w20: U27.2@9419.49,2861 9519.5,2861 R116.1@9525,2855.5 9524,2856.5 R115.2@9524,2925.54
NetR119_2: R119.2 R120.1 U27.6 | length 183
  Top Layer w20: R119.2@9119,2930.54 9121,2928.54 R120.1@9121,2859.5 ; 9121,2907 9125,2911 U27.6@9230.51,2911
NetR128_1: R128.1 U25.3 U25.4 | length 66.5
  Top Layer w100: R128.1@9379.98,4080.92 9446.44,4080.92
NetT8_1: T8.1 U16.39 | length 295.4
  Top Layer w8: U16.39@8107.17,3340.95 8107.17,3443.17 v2@8123,3459
  Bottom Layer w8: v2(8123,3462) 8180.48,3519.48 T8.1@8180.48,3609.03
NetT10_1: T10.1 U16.26 | length 350.9
  Top Layer w8: U16.26@8298.11,3150 8421,3150 v2@8423,3152
  Bottom Layer w8: v2(8422,3149) 8542.45,3149 T10.1@8616.48,3223.03
NetT14_1: T14.1 U18.A11 | length 132.8
  Top Layer w8: T14.1@4664.48,3606.03 4712.93,3606.03 4733.96,3585 4781.93,3585 U18.A11@4786.61,3580.32
NetT15_1: T15.1 U6.29 | length 190.7
  Top Layer w8: U6.29@3771.99,3871.63 3880.13,3871.63 T15.1@3938.5,3930
NetT16_1: T16.1 U18.M1 | length 701
  Top Layer w6: U18.M1@5219.69,3186.61 5219.69,3122.31 5456,2886 5650.48,2691.52 T16.1@5650.48,2664.03
NetT18_1: T18.1 U10.29 | length 173.6
  Top Layer w8: U10.29@3791.99,3351.63 3890.13,3351.63 T18.1@3943.5,3405
NetT21_1: T21.1 U14.29 | length 217
  Top Layer w8: U14.29@3791.99,2811.63 3856,2811.63 ; 3891.63,2811.63 3856,2811.63 ; 3910.63,2811.63 3856,2811.63 ; 3914.13,2811.63 T21.1@3958.5,2856
OUT1+: R10.2 R11.1 U7.4 | length 200.6
  Top Layer w20: U7.4@3294.49,3912 3420,3912 ; R10.2@3420,3873.46 3420,3912 ; R11.1@3420,3948.5 3420,3912
OUT1-: R24.1 U7.5 | length 126
  Top Layer w10: U7.5@3088,3912 U7.5@3105.51,3912
  Top Layer w20: U7.5@3088,3912 3088,4020 R24.1@3088.5,4020
OUT2+: R27.2 R28.1 U11.4 | length 247.2
  Top Layer w20: U11.4@3294.49,3442 3347,3442 3395.54,3393.46 3420,3393.46 3420,3420 ; R27.2@3420,3373.46 R28.1@3420,3448.5
OUT2-: R41.1 U11.5 | length 113.3
  Top Layer w20: R41.1@3068.5,3540 3068.5,3479.01 U11.5@3105.51,3442
OUT3+: R44.2 R45.1 U15.4 | length 298.8
  Top Layer w20: 3371.46,2922 U15.4@3294.49,2922 3417,2922 R45.1@3420,2925 ; 3420,2873.46 R44.2@3420,2853.46 R45.1@3420,2925 ; R45.1@3420,2928.5 R45.1@3420,2925
OUT3-: R58.1 U15.5 | length 141.6
  Top Layer w20: R58.1@3048.5,3040 3048.5,2979.01 U15.5@3105.51,2922
PA15: D2.2 U16.50 | length 302.6
  Top Layer w8: D2.2@7579.07,3307.64 7638.29,3248.43 U16.50@7857.17,3248.43
REF_V2: R90.2 R91.1 U22.22 | length 236.3
  Top Layer w8: R91.1@6251.5,3760 6253.46,3761.97 6253.46,3810 ; R90.2@6253.46,3860 6253.46,3810 ; U22.22@6387.81,3812.65 6256.12,3812.65 6253.46,3810
RESET_FPGA: C156.2 R136.1 U18.G21 | length 733.8
  Top Layer w6: R136.1@4461.5,4015 C156.2@4556.54,4015 ; 4508,4015 4508,3967 4559.2,3915.8 4674,3915.8 ; 4655.73,3915.8 4674,3915.8 ; U18.G21@5022.83,3974.02 5003.82,3955 4970,3955 4962.94,3947.94 4962.94,3926.84 4951.9,3915.8 4674,3915.8
RST: C47.1 R67.1 U16.7 | length 290.2
  Top Layer w8: U16.7@8048.11,2900 8048.11,2958.11 8090,3000 8090,3047 v2@8089,3048
  Bottom Layer w8: C47.1@8051.5,3000 8090,3000 ; v2@8089,3047 8090,3046 8090,3000 ; R67.1@8128.5,3000 8090,3000
  other v2: 8088,3048
RX1: J2.3 U16.43 | length 274.6
  Top Layer w8: J2.3@7854,3498 7914,3438 7991.37,3438 8028.43,3400.95 U16.43@8028.43,3340.95
SCL: R70.1 U16.9 U21.6 | length 626.8
  Top Layer w8: 8087.48,2842.52 8144.5,2785.5 ; v2@8331,2694 8272,2694 8203,2763 8167,2763 ; 8144.5,2785.5 8167,2763 ; 8144.5,2785.5 8150,2780 8167,2763
  Top Layer w10: 8087.48,2842.52 U16.9@8087.48,2900
  Bottom Layer w10: v2(8334,2694) 8334,2702.5 R70.1@8400,2768.5 8460.5,2708 U21.6@8505.51,2708
SCLK_1A: R18.2 U18.A19 | length 867.3
  Top Layer w8: R18.2@4093.46,4110 4190,4110 4405,3895 4518,3895 4675,3895 ; 4760,3895 4675,3895 ; U18.A19@4786.61,3895.28 4786.34,3895 4675,3895
SCLK_2A: R35.2 U18.A10 | length 810.8
  Top Layer w8: R35.2@4093.46,3520 4200,3520 4235,3485 4625,3485 4680,3540 ; 4760,3540 4680,3540 ; U18.A10@4786.61,3540.94 4785.67,3540 4680,3540
SCLK_3A: R52.2 U18.B4 | length 926.8
  Top Layer w6: R52.2@4093.46,2955 4147.32,2955 4195.66,3003.34 4195.66,3087.66 4375,3267 4717.2,3267 4735.2,3285 4806.26,3285 U18.B4@4825.98,3304.72
SDA: R86.1 U16.8 U21.5 | length 669.8
  Top Layer w10: U16.8@8067.8,2900 8067.8,2822.2 8097,2793 ; 8100,2790 8097,2793 ; 8180,2742 8170,2742 ; 8250,2676 8225,2701 ; v2@8333,2646 8280,2646 8225,2701 ; 8097,2793 8148,2742 8170,2742 ; 8170,2742 8184,2742 8225,2701
  Bottom Layer w10: v2(8334,2646) 8354.5,2646 R86.1@8400,2691.5 8433.5,2658 U21.5@8505.51,2658
SGND: C5.2 C8.2 C16.2 C24.2 C25.2 C33.2 C34.1 C36.1 C37.1 C38.2 C45.2 C46.1 C83.2 C84.2 C147.1 C148.1 C151.1 D4.2 D6.2 P11.1 R73.2 R111.2 U4.2 U4.5 U12.2 U17.1 U25.5 | length 1729
  Top Layer w20: D6.2@8446.64,3867.92 8497.08,3867.92 v2@8506,3859 ; C36.1@8605.06,3376.92 8632.93,3349.05 U17.1@8723.33,3349.05 ; C37.1@8760.92,3212.94 v2@8760.92,3259.92 ; C33.2@9006.08,3207.06 v2@9006.08,3259.08 ; C25.2@9329.92,3209.94 v2@9329.92,3258.92 ; D4.2@9375.36,3705.08 9377.94,3707.66 C83.2@9377.94,3837.08 ; v2@9476,3878 9500,3902 U25.5@9500,3945.51 ; C147.1@9526.5,3770 C147.1@9525,3771.5 9567.5,3771.5 v2@9567,3772 ; v2(9585,3408) 9585,3354.5 C151.1@9595.5,3344 ; v2(9600,3564) 9600,3532.54 R111.2@9600.54,3532 ; C148.1@9658,3766.5 v2@9695.5,3766.5
  Bottom Layer w20: v2@8532,3845 8535,3848 R73.2@8565.54,3848 ; C46.1@8889,3386 8956,3453 v2@8957,3453 ; C45.2@9070,3705 C45.2@9095,3680 ; C16.2@9469,3688 C16.2@9482,3675 9449,3708 9449,3763 9472,3763 C16.2@9472,3685 ; C38.2@9550.08,4124.94 9550.08,4147.08 9618,4215 9782,4215 v2@9812,4185
  Bottom Layer w50: v2@8753.92,3943.92 C84.2@8811.94,3943.92 ; v2@9178,3950 9179.92,3951.92 C5.2@9222.94,3951.92 ; C8.2@9677,3675 9725,3627 P11.1@9836,3627
  other v2: 9006,3252 8761,3253 9331,3253 8649,3349.05 8680,3349.05 9546,3407 9623,3407 8961,3449 9439,3626 9094,3723 9126,3723 9059,3724 9447,3750 9472,3750 9695,3768 9565,3771.5 9375,3774 8532,3846 8504,3862 9478,3878 8750,3940 9178,3953 9814,4182
SPI1_MISO: U16.35 U18.AB5 | length 2909.2
  Top Layer w6: U18.AB5@5613.39,3344.09 5614.29,3345 5685,3345 ; 5635,3345 5685,3345 ; 5740,3345 5685,3345
  Top Layer w8: 5740,3345 5746.36,3351.36 6203.36,3351.36 6235,3383 6839.25,3383 7032.25,3576 8105.75,3576 8185.91,3495.84 U16.35@8185.91,3340.95 U16.35@8184.13,3342.73
SPI1_MOSI: U16.36 U18.V5 | length 3007.6
  Top Layer w6: U18.V5@5455.91,3344.09 v1(5475,3325)
  Top Layer w8: v1(5725,3325) 5765,3325 5775.36,3335.36 6140.36,3335.36 ; 6140,3335 6140.36,3335.36 ; 6237.31,3362.69 6240.63,3366 ; U16.36@8166.22,3340.95 8166.22,3492.9 8099.12,3560 7038.88,3560 6844.88,3366 6240.63,3366 ; 6140.36,3335.36 6209.99,3335.36 6240.63,3366
  Bottom Layer w6: v1@5470,3330 v1(5475,3325) v1(5725,3325)
SPI1_NSS: U16.33 U18.AB6 | length 2909.8
  Top Layer w6: U18.AB6@5613.39,3383.46 U18.AB6@5613.49,3383.36
  Top Layer w8: U18.AB6@5613.49,3383.36 6178.36,3383.36 6210,3415 6824,3415 7017,3608 8119,3608 8225.28,3501.72 U16.33@8225.28,3340.95
SPI1_SCK: U16.34 U18.AA5 | length 2941.2
  Top Layer w6: U18.AA5@5574.02,3344.09 5574.09,3344.09 5594.62,3364.62 ; 5587.38,3357.38 5594.62,3364.62 ; 5730,3364.36 5615.26,3364.36 5615,3364.62 5594.62,3364.62
  Top Layer w8: 5730,3364.36 5733,3367.36 6184.99,3367.36 6216.63,3399 6830.63,3399 7023.63,3592 8112.37,3592 8205.59,3498.78 U16.34@8205.59,3340.95
SYNC_1A: R22.2 U18.A16 | length 713
  Top Layer w8: R22.2@4093.46,3825 4113.46,3805 4758.78,3805 U18.A16@4786.61,3777.17
SYNC_2A: R39.2 U18.A8 | length 826.3
  Top Layer w8: R39.2@4093.46,3255 4128.46,3255 4234.23,3360.77 ; 4250,3376.54 4234.23,3360.77 ; 4750,3460 4725,3460 ; U18.A8@4786.61,3462.2 4784.41,3460 4725,3460 ; 4234.23,3360.77 4289.46,3416 4633.98,3416 4677.98,3460 4725,3460
SYNC_3A: R56.2 U18.B1 | length 1065.7
  Top Layer w6: R56.2@4093.46,2680 4180,2766.53 4180,2907.07 4253,2980.07 4253,3050 4364,3161 4800.37,3161 U18.B1@4825.98,3186.61
TEST_I+: C87.2 R108.1 U27.5 | length 851.6
  Top Layer w15: U27.5@9230.51,2961 9358.76,3089.24 ; C87.2@9321.46,3111 9337,3111 9358.76,3089.24 ; R108.1@9501.5,3654 9501.5,3231.99 9358.76,3089.24
TEST_V+: C151.2 R110.1 R111.1 U27.3 | length 999.2
  Top Layer w15: U27.3@9419.49,2911 9350,2911 9330,2931 9330,3007 9663,3340 R110.1@9663,3614.5
  Top Layer w20: R111.1@9663,3534.5 R110.1@9663,3614.5
TMP_DATA: P8.3 U16.24 | length 452.1
  Top Layer w8: U16.24@8298.11,3110.63 8378.37,3110.63 8403,3086 8403,3068 8441,3030 8620,3030 P8.3@8681,3091
TMP_DATA1: P8.2 U16.25 | length 350.9
  Top Layer w8: U16.25@8298.11,3130.32 8389.68,3130.32 8420,3100 8420,3074 8447,3047 8537,3047 P8.2@8581,3091
TX1: J2.2 U16.42 | length 196
  Top Layer w8: J2.2@7954,3498 8048.11,3403.89 U16.42@8048.11,3340.95
X1: C58.1 U16.5 Y1.2 | length 370.1
  Top Layer w8: Y1.2@7955.02,2680.17 8008.74,2733.88 U16.5@8008.74,2900
  Bottom Layer w10: C58.1@7840,2711.5 7923.69,2711.5 Y1.2@7955.02,2680.17
X2: C59.1 U16.6 Y1.1 | length 380.3
  Top Layer w8: U16.6@8028.43,2900 8028.43,2806.76 Y1.1@8155.02,2680.17
  Bottom Layer w10: C59.1@8060,2711.5 8123.69,2711.5 Y1.1@8155.02,2680.17
pads on no net: J1.7 J1.8 P11.2 U1.8 U1.13 U2.8 U2.13 U5.1 U5.5 U6.1 U6.2 U6.3 U6.4 U6.8 U6.15 U6.16 U6.20 U8.1 U8.3 U8.5 U8.7 U8.8 U9.1 U9.5 U10.1 U10.2 U10.3 U10.4 U10.8 U10.15 U10.16 U10.20 U13.1 U13.5 U14.1 U14.2 U14.3 U14.4 U14.8 U14.15 U14.16 U14.20 U16.10 U16.11 U16.20 U16.21 U16.22 U16.23 U16.27 U16.29 U16.30 U16.37 U16.38 U16.40 U16.41 U16.44 U16.45 U16.55 U16.56 U16.61 U18.A7 U18.A13 U18.A14 U18.A15 U18.AA1 U18.AA3 U18.AA6 U18.AA8 U18.AA9 U18.AA10 U18.AA11 U18.AA12 U18.AA13 U18.AA14 U18.AA15 U18.AA16 U18.AA17 U18.AA18 U18.AA19 U18.AA20 U18.AA21 U18.AB4 U18.AB9 U18.AB11 U18.AB12 U18.AB14 U18.AB15 U18.AB17 U18.AB19 U18.B5 U18.B6 U18.B7 U18.B8 U18.B11 U18.B12 U18.B13 U18.B14 U18.B15 U18.B16 U18.B17 U18.B18 U18.B20 U18.B22 U18.C1 U18.C2 U18.C3 U18.C4 U18.C6 U18.C7 U18.C8 U18.C10 U18.C13 U18.C15 U18.C17 U18.C18 U18.C19 U18.C20 U18.C21 U18.D2 U18.D6 U18.D7 U18.D8 U18.D10 U18.D13 U18.D15 U18.D17 U18.D18 U18.D19 U18.D20 U18.D21 U18.E1 U18.E3 U18.E4 U18.E5 U18.E6 U18.E7 U18.E8 U18.E9 U18.E11 U18.E12 U18.E13 U18.E14 U18.E15 U18.E16 U18.E21 U18.F1 U18.F2 U18.F7 U18.F8 U18.F9 U18.F10 U18.F11 U18.F13 U18.F14 U18.F15 U18.F17 U18.F19 U18.F20 U18.F21 U18.G1 U18.G3 U18.G4 U18.G5 U18.G7 U18.G18 U18.G22 U18.H1 U18.H2 U18.H3 U18.H4 U18.H5 U18.H6 U18.H7 U18.H17 U18.H18 U18.H19 U18.H20 U18.H21 U18.H22 U18.J1 U18.J2 U18.J3 U18.J4 U18.J5 U18.J6 U18.J18 U18.J19 U18.J20 U18.J21 U18.K18 U18.K19 U18.K21 U18.K22 U18.L6 U18.L21 U18.L22 U18.M2 U18.M3 U18.M4 U18.M5 U18.M6 U18.M16 U18.M19 U18.M20 U18.M21 U18.N5 U18.N6 U18.N18 U18.N19 U18.N20 U18.N21 U18.N22 U18.P3 U18.P4 U18.P5 U18.P20 U18.P21 U18.P22 U18.R3 U18.R4 U18.R5 U18.R14 U18.R16 U18.R17 U18.R18 U18.R19 U18.R20 U18.R21 U18.T1 U18.T2 U18.T3 U18.T4 U18.T5 U18.T15 U18.T16 U18.T17 U18.T18 U18.T19 U18.T20 U18.T21 U18.T22 U18.U1 U18.U2 U18.U9 U18.U10 U18.U11 U18.U12 U18.U14 U18.U15 U18.U16 U18.U17 U18.U19 U18.U20 U18.U21 U18.V1 U18.V2 U18.V3 U18.V4 U18.V8 U18.V9 U18.V10 U18.V11 U18.V12 U18.V13 U18.V14 U18.V15 U18.V16 U18.V21 U18.V22 U18.W1 U18.W2 U18.W6 U18.W7 U18.W8 U18.W10 U18.W13 U18.W14 U18.W15 U18.W17 U18.W19 U18.W20 U18.W21 U18.W22 U18.Y1 U18.Y2 U18.Y8 U18.Y10 U18.Y13 U18.Y14 U18.Y15 U18.Y17 U18.Y21 U19.1 U20.3 U20.4 U20.5 U20.6 U20.11 U20.12 U20.13 U20.14 U22.5 U22.6 U22.8 U22.9 U22.10 U22.12 U22.14 U22.21 U22.30 U23.8 U23.13 U24.8 U24.13 U28.0
copper on no net:
  other v5: 7494,2172 1905,4060 5897,4109 7809,4533

## Polygon pours and split planes (outlines as drawn)
DGND on GND "GND-No Net 1" (solid): 4201,4324 4222,4303 4222,2348 10102,2348 10130,2376 10077,2429 10077,3479 9808,3479 9783,3454 9456,3127 9456,3070 8775,3070 8730,3115 8489,3356 8489,3761 8452,3761 8350,3863 8399,3912 8399,4365 4296,4365 4214,4283
SGND on GND "GND-No Net 1" (solid): 8395,4312 8407,4300 8407,3830 8489,3830 8534,3785 8538,3781 8538,3332 8562,3332 8619,3275 8651,3307 8693,3307 8693,3201 8717,3177 8762,3132 9322,3132 9461,3132 9669,3340 9726,3397 9726,3507 9991,3507 9995,3503 10028,3536 10028,4214 10028,4320 9971,4377 9885,4291 8403,4291
AGND on GND "GND-No Net 1" (solid): 1810,4184 1798,4172 1798,2368 4184,2368 4203,2387 4190,2400 4190,4368 2025,4368 1804,4147
AGND on GND "GND-No Net" (solid, pour order 1001): 3857,3584 3860,3587 4001,3587 4001,3809 3998,3812 3996,3814 3887,3814 3887,3649 3860,3622 3857,3619 3857,3584
AGND on GND "GND-No Net" (solid, pour order 1000): 3885,3812 3887,3814 3998,3814 3998,3591 4002,3587 3996,3593 3860,3593 3860,3679 3871,3690 3885,3704 3885,3812

## Keep-outs
Keep-Out Layer:
  lines w8: 9985,2481 9985,4240 9985,4245 9980,4250 9730,4250 1745,4250 1745,2481.26 9985,2481.26

## Other copper
Top Layer:
  rectangle net DGND: 7856,3644 8033,3753
  rectangle net +5V_D: 6950,4055 7145,4130
  rectangle net NetC112_1: 6395,3465 6430,3745
  rectangle net NetC113_1: 6600,3745 6885,3775
  rectangle net NetC137_2: 6415,3935 6435,4075
  rectangle net NetJ4_2: 6490,3695 6510,3750
  rectangle net NetC113_1: 6775,3675 6895,3780
  rectangle net +12V: 9588,4083 9708,4188
  rectangle net NetR128_1: 9451,4068 9562,4184
  rectangle net NetC16_1: 7961,3802 8122,3902
  rectangle net +5V_485: 8070,4009 8138,4163
VCC:
  rectangle net AGND: 3918,3579 3998,3781
  rectangle net AGND: 3899,3006.43 4024,3078
  rectangle net AGND: 3912,3137 4021,3198
  rectangle net AGND: 3969,2992.57 4046,3195.57
  rectangle net +3.3V: 5689,3480 5790,3528
  rectangle net NetJ4_2: 6805,4050 6865,4140
  rectangle net NetC113_1: 6785,3680 6895,3730
GND:
  rectangle net AGND: 3885,3574.06 4005.27,3622
  rectangle net AGND: 3911,3609 4007,3788
  rectangle net AGND: 3896,2989 4048,3079
  rectangle net AGND: 3915,3132 4050,3197
  rectangle net AGND: 3960.18,3017.66 4051.27,3192.43
Bottom Layer:
  rectangle net +1.2V: 5729,3713 5939,3745
  rectangle net NetC113_1: 6000,3695 6135,3750
  rectangle net +5V_485: 8071,4009 8146,4160
  rectangle net +5V_D: 6934,4037 7230,4120

## Silkscreen, mask and mechanical layers (free items; w line width, h text height)
Top Overlay:
  circle w10: c5517.84,2779 r37.16
  text "-12V" at 9683,4512 h25
  text "+3.3V" at 9671,4459 h25
  text "SGND" at 9687,4412 h25
  text "WZY V2.0 2018.01.01" at 2086,4397 h25
  text "2.5V" at 7177,4178 h25
  text "GND" at 4245,4145 h25
  text "B21" at 4605,4075 h25
  text "D22" at 4789,4075 h25
  text "C22" at 4697,4074 h25
  text "AB20" at 5626,4074 h25
  text "E22" at 4894,4073 h25
  text "A20" at 4488,4072 h25
  text "F22" at 4992,4072 h25
  text "J22" at 5088,4072 h25
  text "M22" at 5191,4071 h25
  text "U22" at 5377,4071 h25
  text "Y22" at 5484,4071 h25
  text "R22" at 5288,4070 h25
  text "+12V" at 9678,4052 h25 r90
  text "AGND" at 2024,3873 h25 r270
  text "+IN1" at 2023,3749 h25 r270
  text "1.2V" at 7031,3632 h25
  text "AGND" at 2017,3533 h25 r270
  text "A11" at 4648,3525 h25
  text "+3.3V" at 6768,3519 h25
  text "+IN2" at 2024,3402 h25 r270
  text "AGND" at 3787,3063 h25
  text "GND" at 5387,3031 h25
  text "G1" at 4885,3002 h25
  text "M1" at 5450,2911 h25
  text "1" at 5513,2762 h40
  text "HMC5883" at 7778,2751 h25 r90
  text "DHT" at 9568,2589 h25 r90
  text "AGND" at 2047,2339 h25
  text "+IN3" at 2167,2334 h25